# Altium PCB XXXX.758723.001.PcbDoc
Units mm, origin at the board's own origin, x right, y up, seen from the top; angles counter-clockwise.
Board outline 35 x 20 mm, 2 copper layers (Top Layer, Bottom Layer), stack 1.6 mm thick; 17 components, 5 nets, 46 pads, 48 vias.
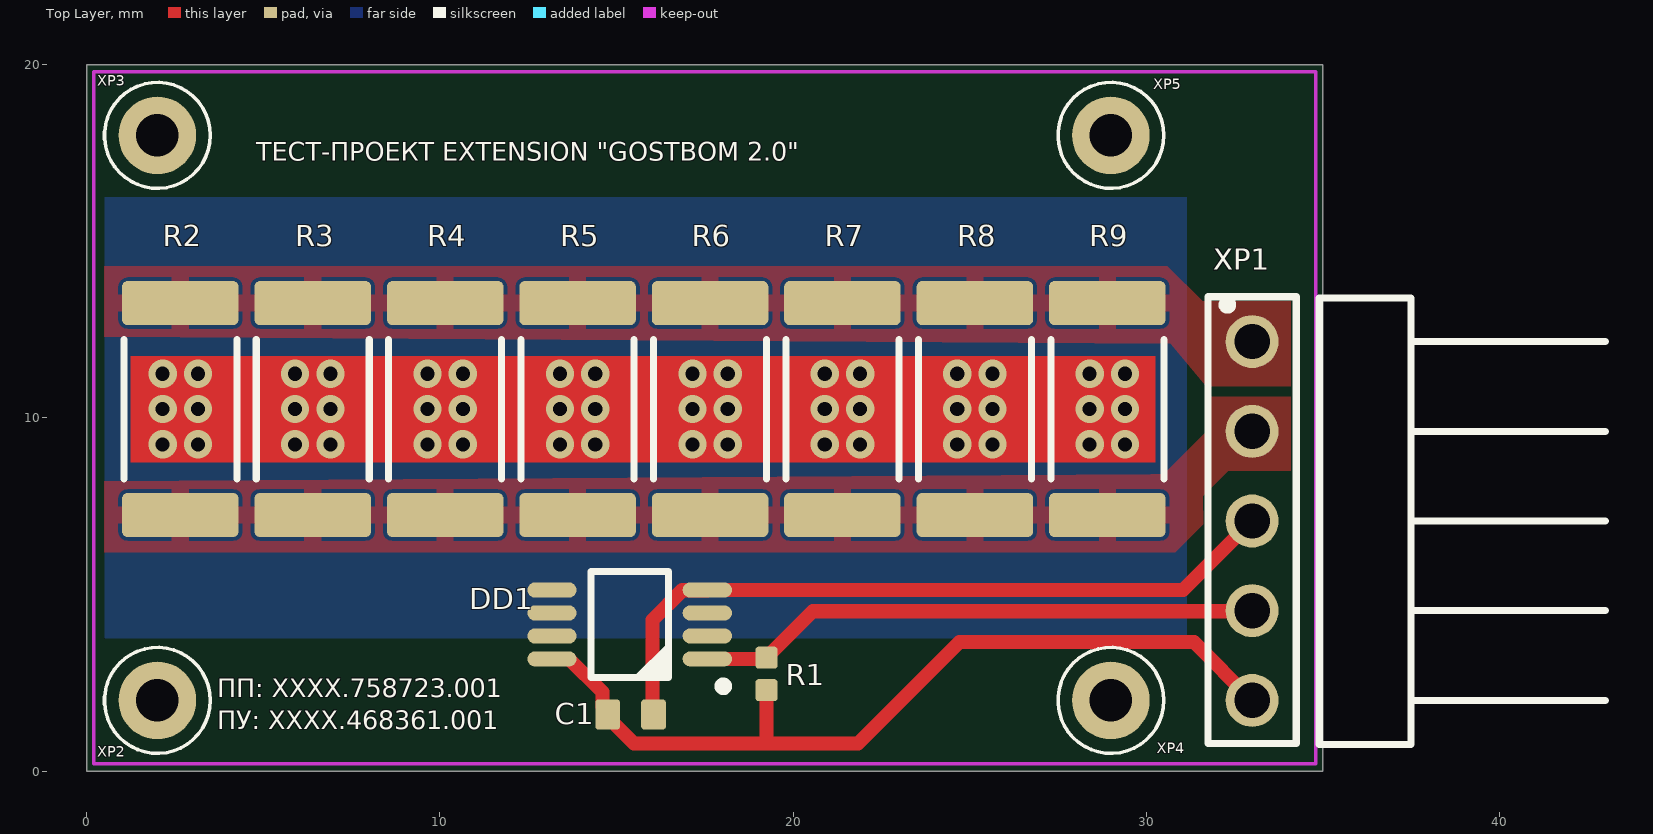
[diagram p0: Top Layer view]
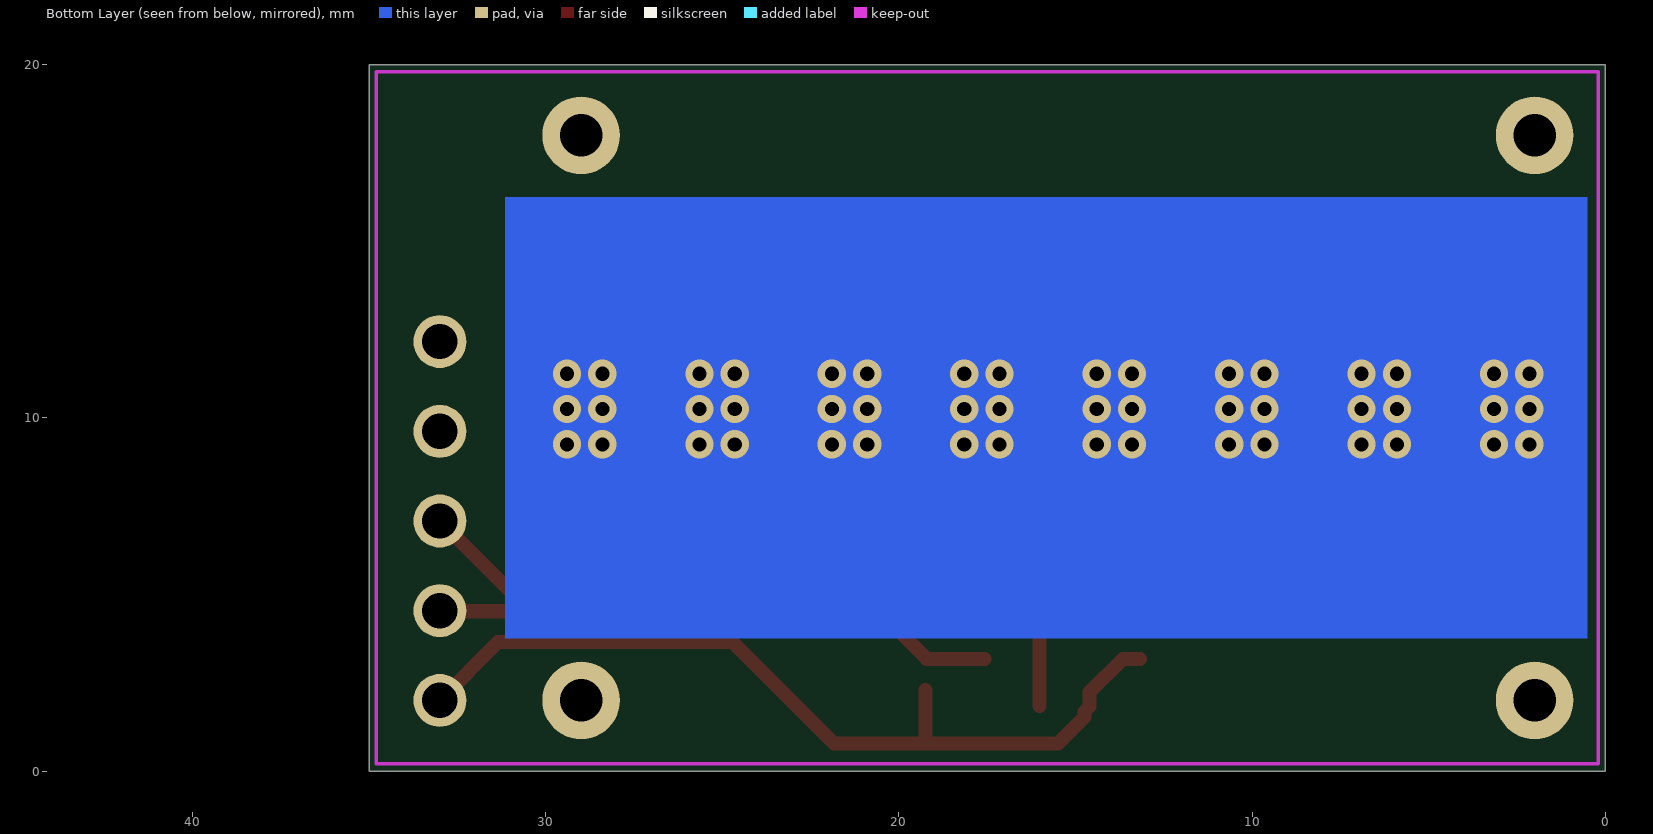
[diagram p1: Bottom Layer view, seen from below]
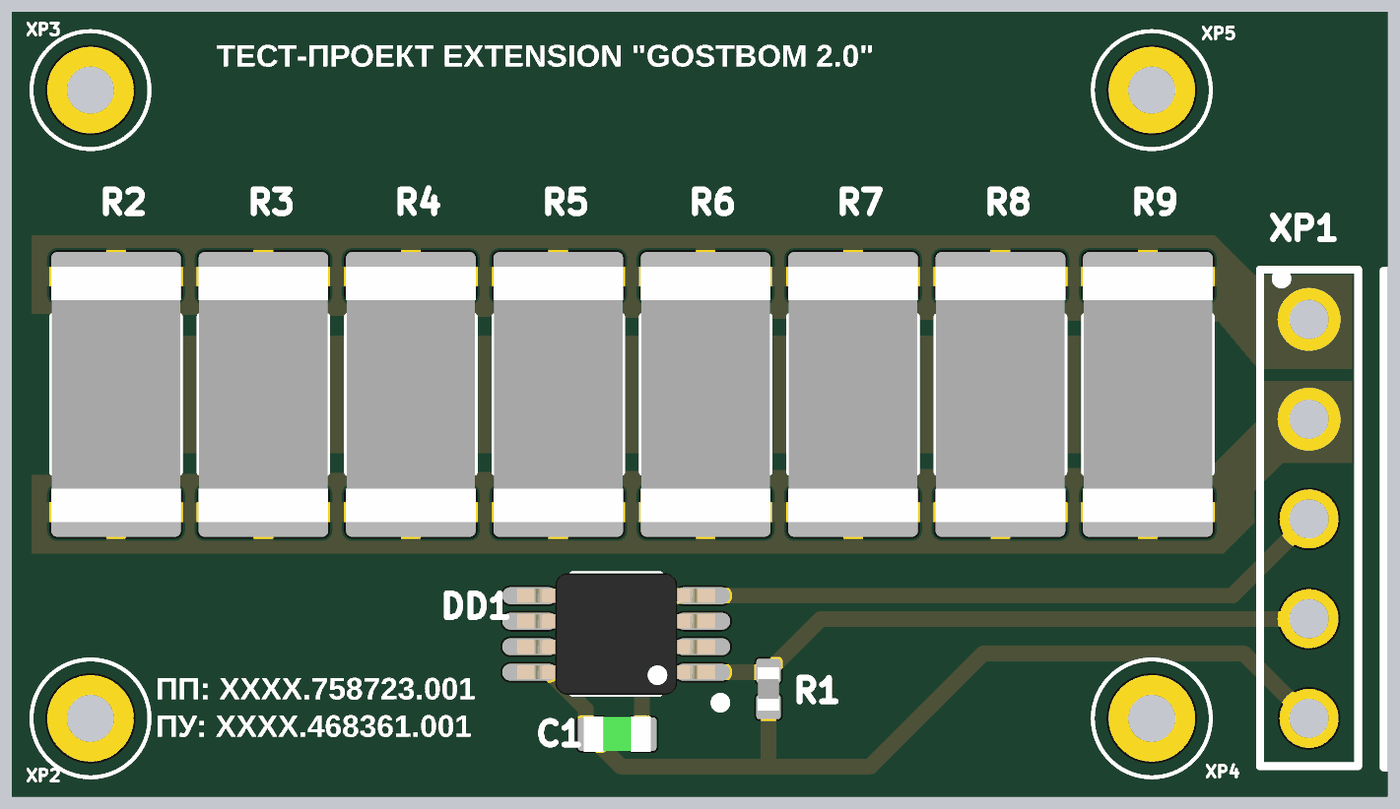
[diagram p2: 3D render of the assembled board from above, using the file's embedded part models]

## Layer stack, top to bottom
Top Solder: solder mask 0.0102, Solder Resist, Dk 3.5
Top Layer: signal copper 0.05
Dielectric1: core 1.5, FR-4, Dk 4.8
Bottom Layer: signal copper 0.05
Bottom Solder: solder mask 0.0102, Solder Resist, Dk 3.5

## Board outline
0,0 35,0 35,20 0,20

## Design rules (kind name [scope] priority, off if disabled: settings)
Clearance Clearance_XP [InPadClass('PAD_Class') vs InPadClass('PAD_Class')] p1 off: gap=-2 ignorepadtopadclearanceinfootprint=FALSE
Clearance Clearance_All [All] p2: gap=0.2 ignorepadtopadclearanceinfootprint=FALSE except(0: Arc-Hole Track-Hole SMDPad-Hole THPad-Hole Via-Hole Fill-Hole Poly-Hole Region-Hole Text-Hole)
ComponentClearance ComponentClearance_XP [HasFootprint('ELECTRODETAL_SNP346-5VP21-1') vs HasFootprint('ELECTRODETAL_SNP346-5VP31-1')] p1: gap=-0.5 collisioncheckmode=3 verticalgap=0 showdistances=FALSE
ComponentClearance ComponentClearance_All [All] p2: gap=0.2 collisioncheckmode=3 verticalgap=0.2 showdistances=FALSE
FabricationTestPointUsage TestPointUsage [All] p1: valid=0 allowmultiple=FALSE
FabricationTestpoint Testpoint [All] p1: side=3 testpointundercomponent=TRUE minsize=1.016 maxsize=2.54 preferedsize=1.524 minholesize=0 maxholesize=1.016 preferedholesize=0.813 testpointgrid=0.025 allowsidetop=TRUE allowsidebottom=TRUE usegrid=TRUE gridtolerance=0
PolygonConnect [All] p1: thpad.connectstyle=Direct thpad.reliefconductorwidth=0.25 thpad.reliefentries=4 thpad.polygonreliefangle="90 Angle" thpad.airgapwidth=0.254 smdpad.connectstyle=Relief smdpad.reliefconductorwidth=0.5 smdpad.reliefentries=4 smdpad.polygonreliefangle="90 Angle" smdpad.airgapwidth=0.1 via.connectstyle=Direct via.reliefconductorwidth=0.25 via.reliefentries=4 via.polygonreliefangle="90 Angle" via.airgapwidth=0.254
RoutingVias [All] p1: holewidth=0.2 width=0.5 viastyle="Through Hole" minholewidth=0.2 minwidth=0.5 maxholewidth=0.7 maxwidth=1
SilkToSolderMaskClearance SilkscreenOverComponentPads [IsPad] p1: minsilkscreentomaskgap=0.254 clearancetoexposedcopper=TRUE
SolderMaskExpansion [All] p1: expansion=0.05
Width [All] p1: maxlimit=2 minlimit=0.25 preferedwidth=0.25
26 further rules are at their usual default settings.

## Classes and differential pairs
pad class PAD_Class: XP1-1 XP1-2 XP1-3 XP1-4 XP1-5

## Components (designator, comment, footprint, x,y, rotation, side; value= is the part's Value field where it differs from the comment)
C1 "GRM 0603 0,1 мкФ ±10% 50В X7R" CAPC1608X90N 15.4,1.6 r0 top
DD1 "DS18B20U+" SOP65P490X110-8CN 15.375,4.15 r180 top
R1 "CR 0402 4,7 кОм ±1%" RESC1005X40N 19.25,2.75 r270 top
R2 "CR 2512 820 Ом ±1%" RESC6331X75N 2.65,10.25 r90 top
R3 "CR 2512 820 Ом ±1%" RESC6331X75N 6.4,10.25 r90 top
R4 "CR 2512 820 Ом ±1%" RESC6331X75N 10.15,10.25 r90 top
R5 "CR 2512 820 Ом ±1%" RESC6331X75N 13.9,10.25 r90 top
R6 "CR 2512 820 Ом ±1%" RESC6331X75N 17.65,10.25 r90 top
R7 "CR 2512 820 Ом ±1%" RESC6331X75N 21.4,10.25 r90 top
R8 "CR 2512 820 Ом ±1%" RESC6331X75N 25.15,10.25 r90 top
R9 "CR 2512 820 Ом ±1%" RESC6331X75N 28.9,10.25 r90 top
XP1 "=Name" ELECTRODETAL_SNP346-5VP31-1 33,2 r90 top locked
XP1 "СНП346-5ВП21-1-В" ELECTRODETAL_SNP346-5VP21-1 33,12.16 r270 top locked
XP2 "Лепесток 2-1-2-7-02 ГОСТ 16840-78" ELPetalPin_2-1-2-7-02GOST_16840 2,2 r0 top
XP3 "Лепесток 2-1-2-7-02 ГОСТ 16840-78" ELPetalPin_2-1-2-7-02GOST_16840 2,18 r0 top
XP4 "Лепесток 2-1-2-7-02 ГОСТ 16840-78" ELPetalPin_2-1-2-7-02GOST_16840 29,2 r0 top
XP5 "Лепесток 2-1-2-7-02 ГОСТ 16840-78" ELPetalPin_2-1-2-7-02GOST_16840 29,18 r0 top

## Footprints (in the part's own frame and the unit in brackets; to place one, negate y for a bottom-side part, rotate by r counter-clockwise, add the part's x,y. Pads: shape width x height; smd on the part's side, far side on the other; paste and mask are expansions set on the pad)
CAPC1608X90N [mm] "Capacitor,non-polarized,Chip;1.60mm L X 0.8mm W X 0.90mm H"
  rrect25% 0.7x0.85 smd: 1(-0.65,0) 2(0.65,0)
  body extent -0.85,-0.45 0.85,0.45, height 0.9
ELECTRODETAL_SNP346-5VP21-1 [mm] "Connector right-angle; pitch-2.54mm pitch; 5 pins."
  round 1.5 hole 1: 1(0,0) 2(2.54,0) 3(5.08,0) 4(7.62,0) 5(10.16,0)
  silkscreen extent -1.27,-1.25 11.37,1.25, body extent -1.27,-1.27 11.43,1.27, height 8.8
ELECTRODETAL_SNP346-5VP31-1 [mm] "Connector right-angle; pitch-2.54mm pitch; 5 pins."
  round 1.5 hole 0.9: 1(10.16,0) 2(7.62,0) 3(5.08,0) 4(2.54,0) 5(0,0)
  silkscreen extent -1.25,-10 11.4,0.82, body extent -1.27,-10.5 11.43,0.31, height 2.5
ELPetalPin_2-1-2-7-02GOST_16840 [mm] "Лепесток 2-1-2-7-02 ГОСТ 16840-78"
  round 2.2 hole 1.2: 1(0,0)
  silkscreen extent -1.5,-1.5 1.5,1.5, body extent -0.87,-0.87 0.87,0.87, height 5
RESC1005X40N [mm] "Resistor,Chip;1.00mm L X 0.50mm W X 0.40mm H"
  rrect25% 0.62x0.62 smd: 1(-0.46,0) 2(0.46,0)
  body extent -0.55,-0.28 0.55,0.28, height 0.4
RESC6331X75N [mm] "Resistor,Chip;6.30mm L X 3.10mm W X 0.75mm H"
  rrect25% 1.25x3.3 smd: 1(-3,0) 2(3,0)
  silkscreen extent -1.97,-1.6 1.97,1.6, body extent -3.25,-1.65 3.25,1.65, height 0.75
SOP65P490X110-8CN [mm] "SOP,0.65mm pitch;8 pin,3.00mm W X 3.00mm L X 1.10mm H body"
  oval 1.4x0.43 smd: 1(-2.2,0.975) 2(-2.2,0.325) 3(-2.2,-0.325) 4(-2.2,-0.975) 5(2.2,-0.975) 6(2.2,-0.325) 7(2.2,0.325) 8(2.2,0.975)
  silkscreen extent -2.77,-1.5 1.1,1.87, body extent -2.51,-1.55 2.52,1.55, height 1.1

## Part data
C1: library part GRM188R71H104KA93#, "Non-polarised capacitor", Manufacturer=MURATA, ManufacturerCountry=США, ValueSCH=0,1мк, Analog=(null), ComponentLink1Description="Manufacturer Link", ComponentLink1URL=www.murata.com, ComponentLink2Description="Datasheet Link", ComponentLink2URL=http://www.murata.com/products/catalog/pdf/c02e.pdf, Group=C, Name="GRM 0603 0,1 мкФ ±10% 50В X7R", Part Number=GRM188R71H104KA93#, PCB_Layout=SMT, Pin Count=2, Status=Разрешен, Наименование=Конденсатор, Обозначение=(null), Раздел="Прочие изделия"
DD1: "Programmable Resolution 1-Wire Digital Thermometer", ValueSCH=(null), Analog=(null), ComponentLink1Description="Manufacturer Link", ComponentLink1URL=www.maximintegrated.com, ComponentLink2Description="Datasheet Link", ComponentLink2URL=http://datasheets.maximintegrated.com/en/ds/DS18B20.pdf, Group=DD, Name=DS18B20U+, Part Number=DS18B20U+, PCB_Layout=SMT, Pin Count=8, Status=Разрешен, Наименование=Микросхема, Обозначение=(null), Раздел="Прочие изделия"
R1: library part CR0402-FX-4701G, Manufacturer=Bourns, ManufacturerCountry=США, ValueSCH=4,7к, Analog=(null), ComponentLink1Description="Manufacturer Link", ComponentLink1URL=www.bourns.com, ComponentLink2Description="Datasheet Link", ComponentLink2URL=http://www.bourns.com/data/global/pdfs/CR0402.pdf, Group=R, Name="CR 0402 4,7 кОм ±1%", Part Number=CR0402-FX-4701G, PCB_Layout=SMT, Pin Count=2, Status=Разрешен, Наименование=Резистор, Обозначение=(null), Раздел="Прочие изделия"
R2 R3 R4 R5 R6 R7 R8 R9: library part CR2512-FX-8200E, Manufacturer=Bourns, ManufacturerCountry=США, ValueSCH=820, Analog=(null), ComponentLink1Description="Manufacturer Link", ComponentLink1URL=www.bourns.com, ComponentLink2Description="Datasheet Link", ComponentLink2URL=http://www.bourns.com/data/global/pdfs/CR2010.pdf, Group=R, Name="CR 2512 820 Ом ±1%", Part Number=CR2512-FX-8200E, PCB_Layout=SMT, Pin Count=2, Status=Разрешен, Наименование=Резистор, Обозначение=(null), Раздел="Прочие изделия"
XP1: library part "СНП346-5ВП31-1-В РЮМК.430420.011ТУ", "Connector 1 pin male - 1 parts", Manufacturer="АО «Карачевский завод «Электродеталь»", ManufacturerCountry=Россия, ValueSCH="1.0А, 125В", Analog=PLS, ComponentLink1Description="Manufacturer Link", ComponentLink1URL=https://www.elektrodetal.com/, ComponentLink2Description="Datasheet Link", ComponentLink2URL=http://www.elektrodetal.com/sites/default/files/downloads/snp346.pdf, Group=XP, Name=СНП346-5ВП31-1-В, Part Number="СНП346-5ВП31-1-В РЮМК.430420.011ТУ", PCB_Layout=PTH, Pin Count=1, ProductCode=27.33.13.120, StandartDoc=РЮМК.430420.011ТУ, Status=Разрешен, Наименование=Соединитель, Обозначение=(null), Раздел="Прочие изделия"
XP1: library part "СНП346-5ВП21-1-В РЮМК.430420.011ТУ", "Connector 1 pin male - 1 parts", Manufacturer="АО «Карачевский завод «Электродеталь»", ManufacturerCountry=Россия, ValueSCH="1.0А, 125В", Analog=PLS, ComponentLink1Description="Manufacturer Link", ComponentLink1URL=https://www.elektrodetal.com/, ComponentLink2Description="Datasheet Link", ComponentLink2URL=http://www.elektrodetal.com/sites/default/files/downloads/snp346.pdf, GOST TU=РЮМК.430420.011ТУ, Group=XP, Name=СНП346-5ВП21-1-В, Part Number="СНП346-5ВП21-1-В РЮМК.430420.011ТУ", PCB_Layout=PTH, Pin Count=1, ProductCode=27.33.13.120, StandartDoc=РЮМК.430420.011ТУ, Status=Разрешен, Наименование=Соединитель, Обозначение=(null), Раздел="Прочие изделия"
XP2 XP3 XP4 XP5: "Connector 1 pin male - 1 parts", ManufacturerCountry=Россия, ValueSCH="1.0А, 125В", ComponentLink1Description="Manufacturer Link", ComponentLink1URL=http://docs.cntd.ru/document/1200044394, ComponentLink2Description="Datasheet Link", ComponentLink2URL=http://docs.cntd.ru/document/1200044394, GOST TU="ГОСТ 16840-78", Group=XP, Name="Лепесток 2-1-2-7-02 ГОСТ 16840-78", Part Number="Лепесток 2-1-2-7-02 ГОСТ 16840-78", PCB_Layout=PTH, Pin Count=1, ProductCode=27.33.13.120, StandartDoc="ГОСТ 16840-78", Status=Разрешен, Наименование=Соединитель, Обозначение=(null), Раздел="Стандартные изделия"

## Free pads (board coordinates)
  round 2.2 hole 1.2: MTH1(2,2) MTH2(2,18) MTH3(29,18) MTH4(29,2)

## Via types
v1: diameter 0.8, hole 0.4, Top Layer to Bottom Layer, 48 vias

## Nets (pads, with @x,y where several pads share a name; then routed paths per layer and width w, separated by ;. In a path a pad name is that pad's centre, name@x,y a point inside that pad or via, vN(x,y) a via of type N, cw(c..) or ccw(c..) an arc to the next point about the centre after c; other vN are vias at no path point)
DQ: DD1.1 R1.1 XP1.4 | length 16.2
  Top Layer w0.4: DD1.1 19.215,3.175 R1.1 20.44,4.4 20.565,4.525 32.985,4.525 XP1.4@33,4.54 ; XP1.4@32.85,4.4 XP1.4@33,4.25
GND: C1.2 DD1.4 XP1.3 | length 20.6
  Top Layer w0.4: C1.2@16.025,1.85 16.025,4.28 16.865,5.119 17.569,5.119 DD1.4 31.045,5.125 XP1.3@33,7.08
R+: R2.1 R3.1 R4.1 R5.1 R6.1 R7.1 R8.1 R9.1 XP1.2 | length 0
R-: R2.2 R3.2 R4.2 R5.2 R6.2 R7.2 R8.2 R9.2 XP1.1
VDD: C1.1 DD1.8 R1.2 XP1.5 | length 24.5
  Top Layer w0.4: DD1.8 13.66,3.175 14.6,2.235 14.6,1.825 14.75,1.675 14.75,1.525 15.5,0.775 19.3,0.775 21.839,0.775 24.714,3.65 31.35,3.65 XP1.5@33,2 ; 19.25,0.825 R1.2
pads on no net: DD1.2 DD1.3 DD1.5 DD1.6 DD1.7 XP2.1 XP3.1 XP4.1 XP5.1
copper on no net:
  other v1: 2.15,9.25 3.15,9.25 5.9,9.25 6.9,9.25 9.65,9.25 10.65,9.25 13.4,9.25 14.4,9.25 17.15,9.25 18.15,9.25 20.9,9.25 21.9,9.25 24.65,9.25 25.65,9.25 28.4,9.25 29.4,9.25 2.15,10.25 3.15,10.25 5.9,10.25 6.9,10.25 9.65,10.25 10.65,10.25 13.4,10.25 14.4,10.25 17.15,10.25 18.15,10.25 20.9,10.25 21.9,10.25 24.65,10.25 25.65,10.25 28.4,10.25 29.4,10.25 2.15,11.25 3.15,11.25 5.9,11.25 6.9,11.25 9.65,11.25 10.65,11.25 13.4,11.25 14.4,11.25 17.15,11.25 18.15,11.25 20.9,11.25 21.9,11.25 24.65,11.25 25.65,11.25 28.4,11.25 29.4,11.25

## Polygon pours and split planes (outlines as drawn)
R- on Top Layer "Top Layer-No Net" (solid, pour order 10): 0.5,12.3 0.5,14.3 30.6,14.3 31.6,13.3 34.1,13.3 34.1,10.9 31.7,10.9 30.702,12.098
R+ on Top Layer "Top Layer-No Net" (solid, pour order 8): 32.322,8.5 31.6,7.778 31.612,6.987 30.825,6.2 0.5,6.2 0.5,8.2 30.128,8.398 30.498,8.398 31.7,9.6 31.7,10.6 34.1,10.6 34.1,8.5
no net on Top Layer "Top Layer-No Net 1" (solid, pour order 6): 0.75,8.25

## Keep-outs
Keep-Out Layer:
  lines w0.1: 0.2,0.2 0.2,19.8 34.8,19.8 34.8,0.2 0.2,0.2

## Other copper
Top Layer:
  region: 1.25,11.75 1.25,8.75 30.25,8.75 30.25,11.75
Bottom Layer:
  rectangle: 0.5,3.75 31.15,16.25

## Silkscreen, mask and mechanical layers (free items; w line width, h text height)
Top Overlay:
  text "ТЕСТ-ПРОЕКТ EXTENSION \"GOSTBOM 2.0\"" at 4.806,17.1 h0.9
  text "ПП: XXXX.758723.001 / ПУ: ХХХХ.468361.001" at 3.7,1 h0.9
Board:
  the board outline again, w0.1